# EAGLE board QFN32-4x4mm (EAGLE 8.1.0)
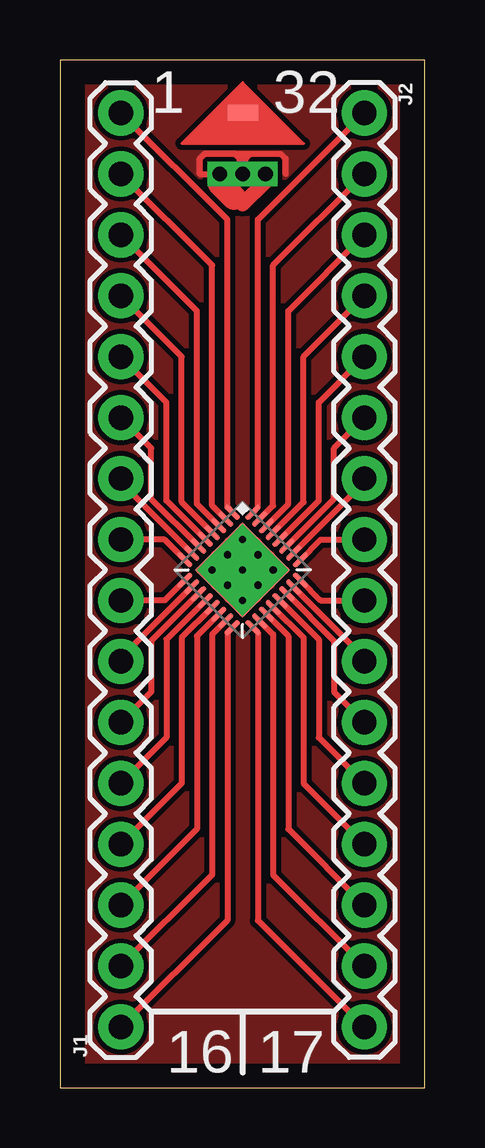
[diagram p0: board, top side]
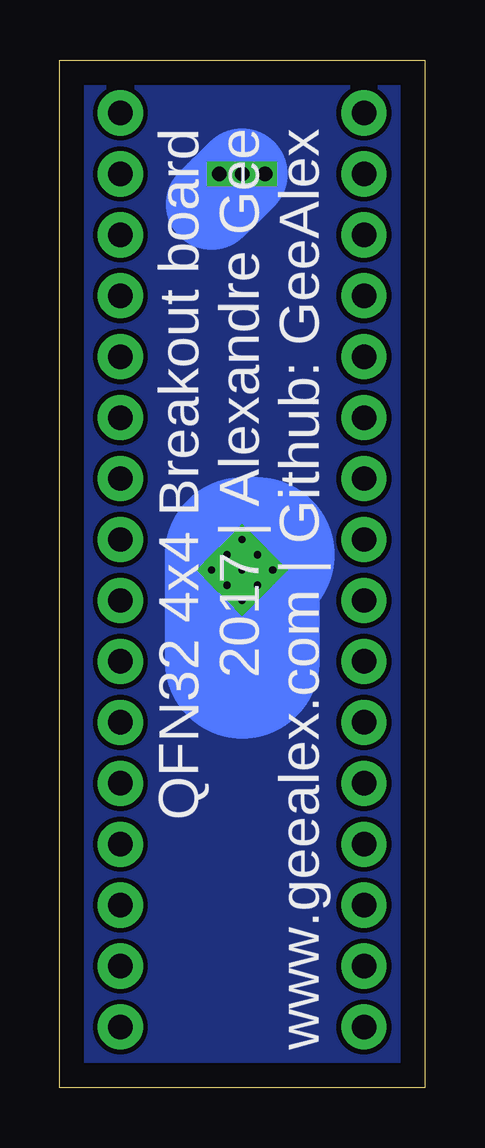
[diagram p1: board, bottom side, seen from below]

Size 15.22 x 42.85 mm. Coordinates in mm from the lower left corner, seen from the top.
Outline: 0,0 15.22,0 15.22,42.85 0,42.85 0,0
Copper layers (1*16): Top 0.035mm / dielectric 1.5mm / Bottom 0.035mm
Design rules "default": minimum track width 10mil, minimum drill 24mil, track to track 8mil, track to pad 8mil, pad to pad 8mil, via to via 8mil, smd to smd 8mil, copper to edge 40mil, drill to drill 8mil, minimum pad ring 10mil, minimum via ring 8mil, stop-mask expansion 4mil, vias tented up to drill 0mil, thermal gap 10mil

## Footprints (pad centres in the part's own frame; a part is rotated, then mirrored left to right if it is on the bottom)
1X16 = drill 1.016 pad 1.88: 1 0,0; 2 2.54,0; 3 5.08,0; 4 7.62,0; 5 10.16,0; 6 12.7,0; 7 15.24,0; 8 17.78,0; 9 20.32,0; 10 22.86,0; 11 25.4,0; 12 27.94,0; 13 30.48,0; 14 33.02,0; 15 35.56,0; 16 38.1,0
VQFN32 = smd 0.21 x 0.8: 1 -1.4,-2; 2 -1,-2; 3 -0.6,-2; 4 -0.2,-2; 5 0.2,-2; 6 0.6,-2; 7 1,-2; 8 1.4,-2; 17 1.4,2; 18 1,2; 19 0.6,2; 20 0.2,2; 21 -0.2,2; 22 -0.6,2; 23 -1,2; 24 -1.4,2 | smd 0.8 x 0.21: 9 2,-1.4; 10 2,-1; 11 2,-0.6; 12 2,-0.2; 13 2,0.2; 14 2,0.6; 15 2,1; 16 2,1.4; 25 -2,1.4; 26 -2,1; 27 -2,0.6; 28 -2,0.2; 29 -2,-0.2; 30 -2,-0.6; 31 -2,-1; 32 -2,-1.4 | smd 2.8 x 2.8: TP0 0,0 | drill 0.3 pad 0.9 square: TP1 0,0; TP2 -0.9,0; TP3 -0.9,-0.9; TP4 0,-0.9; TP5 0.9,-0.9; TP6 0.9,0.9; TP7 0,0.9; TP8 -0.9,0.9; TP9 0.9,0
PAD = smd 1.27 x 0.66: P$1 0,0

## Placement (x,y rotation side)
J1  [1X16]  2.54,2.54 90 top
J2  [1X16]  12.7,40.64 270 top
U$1  VQFN32  [VQFN32]  7.62,21.59 225 top
U$2  POINTUP  [PAD]  7.62,40.64 0 top

## Library data of the parts
J1 J2 = SparkFun-Connectors
U$1 = VQFN32
U$2 = pointup

## Nets
N$1: J2.1 U$1.32
N$2: J2.2 U$1.31
N$3: J2.3 U$1.30
N$4: J2.4 U$1.29
N$5: J2.5 U$1.28
N$6: J2.6 U$1.27
N$7: J2.7 U$1.26
N$8: J2.8 U$1.25
N$9: J2.9 U$1.24
N$10: J2.10 U$1.23
N$11: J2.11 U$1.22
N$12: J2.12 U$1.21
N$13: J2.13 U$1.20
N$14: J2.14 U$1.19
N$15: J2.15 U$1.18
N$16: J2.16 U$1.17
N$17: J1.16 U$1.1
N$18: J1.15 U$1.2
N$19: J1.14 U$1.3
N$20: J1.13 U$1.4
N$21: J1.12 U$1.5
N$22: J1.11 U$1.6
N$23: J1.10 U$1.7
N$24: J1.9 U$1.8
N$25: J1.8 U$1.9
N$26: J1.7 U$1.10
N$27: J1.6 U$1.11
N$28: J1.5 U$1.12
N$29: J1.4 U$1.13
N$30: J1.3 U$1.14
N$31: J1.2 U$1.15
N$32: J1.1 U$1.16
N$38: U$1.TP0 U$1.TP1 U$1.TP2 U$1.TP3 U$1.TP4 U$1.TP5 U$1.TP6 U$1.TP7 U$1.TP8 U$1.TP9 U$2.P$1

## Tracks (layer width: path | path; a pad name or v marks a point on that pad's centre or on a via)
GND
  pour Bottom: 0,42.86 15.24,42.86 15.24,0 0,0
  pour Top: 0,42.86 15.24,42.86 15.24,0 0,0
N$1
  Top 0.254: U$1.32 8.26,24.2 8.26,36.2 J2.1
N$2
  Top 0.254: U$1.31 8.89,24.27 8.89,34.29 J2.2
N$3
  Top 0.254: U$1.30 9.53,24.34 9.53,32.38 J2.3
N$4
  Top 0.254: U$1.29 10.16,24.41 10.16,30.48 J2.4
N$5
  Top 0.254: U$1.28 10.79,24.48 10.79,28.57 J2.5
N$6
  Top 0.254: U$1.27 11.43,24.55 11.43,26.67 J2.6
N$7
  Top 0.254: U$1.26 12.7,25.26 J2.7
N$8
  Top 0.254: U$1.25 10.87,22.86 J2.8
N$9
  Top 0.254: U$1.24 10.87,20.32 J2.9
N$10
  Top 0.254: U$1.23 12.7,17.92 J2.10
N$11
  Top 0.254: U$1.22 11.43,18.63 11.43,16.51 J2.11
N$12
  Top 0.254: U$1.21 10.79,18.7 10.79,14.61 J2.12
N$13
  Top 0.254: U$1.20 10.16,18.77 10.16,12.7 J2.13
N$14
  Top 0.254: U$1.19 9.53,18.84 9.53,10.79 J2.14
N$15
  Top 0.254: U$1.18 8.89,18.91 8.89,8.89 J2.15
N$16
  Top 0.254: U$1.17 8.26,18.98 8.26,6.99 J2.16
N$17
  Top 0.254: U$1.1 6.99,24.2 6.99,36.2 J1.16
N$18
  Top 0.254: U$1.2 6.35,24.27 6.35,34.29 J1.15
N$19
  Top 0.254: U$1.3 5.71,24.34 5.71,32.38 J1.14
N$20
  Top 0.254: U$1.4 5.08,24.41 5.08,30.48 J1.13
N$21
  Top 0.254: U$1.5 4.45,24.48 4.45,28.57 J1.12
N$22
  Top 0.254: U$1.6 3.81,24.55 3.81,26.67 J1.11
N$23
  Top 0.254: U$1.7 2.54,25.26 J1.10
N$24
  Top 0.254: U$1.8 4.37,22.86 J1.9
N$25
  Top 0.254: U$1.9 4.37,20.32 J1.8
N$26
  Top 0.254: U$1.10 2.54,17.92 J1.7
N$27
  Top 0.254: U$1.11 3.81,18.63 3.81,16.51 J1.6
N$28
  Top 0.254: U$1.12 4.45,18.7 4.45,14.61 J1.5
N$29
  Top 0.254: U$1.13 5.08,18.77 5.08,12.7 J1.4
N$30
  Top 0.254: U$1.14 5.71,18.84 5.71,10.79 J1.3
N$31
  Top 0.254: U$1.15 6.35,18.91 6.35,8.89 J1.2
N$32
  Top 0.254: U$1.16 6.99,18.98 6.99,6.99 J1.1
N$33  (via drill 0.61)
  Top 0.254: 6.73,38.48 6.67,38.42 v6.67,38.1 6.78,37.99 6.78,37.45 6.97,37.26 7.1,37.26 7.25,37.1
  Top 1.016: 7.25,37.1 6.67,37.69 v6.67,38.1
N$34  (via drill 0.61)
  Top 0.254: v8.57,38.1 8.46,38.1
  Top 0.61: v8.57,38.1 8.57,37.78 7.62,36.83
N$38  (via drill 0.61)
  Top 0.254: v7.62,38.1 7.51,38.21 7.51,38.74 7.31,38.94 | 7.31,38.94 6.02,38.94 | 5.83,38.74 5.83,38.1 | 6.02,38.94 5.83,38.74 | 9.41,38.74 9.41,38.1 9.41,38.74 | 5.83,38.1 5.83,38.74 | 5.83,38.74 6.02,38.94 | 6.02,38.94 7.31,38.94 | 7.31,38.94 9.22,38.94 | 9.22,38.94 9.41,38.74 | 9.22,38.94 7.93,38.94 7.73,38.74 7.73,38.21 v7.62,38.1 | 9.22,38.94 9.41,38.74 | 5.83,38.1 v7.62,38.1
  Bottom 0.254: v7.62,38.1 7.73,37.99 7.73,37.45 7.93,37.26 8.46,37.26 8.89,36.83
  Bottom 2.54: U$1.TP9 6.35,20.95 U$1.TP5
  Bottom 3.81: 8.89,36.83 v7.62,38.1
  Bottom 6.452: U$1.TP4 7.62,22.23 7.62,17.78
  pour Top: 0,42.86 15.24,42.86 15.24,0 0,0
  pour Bottom: 0,42.86 15.24,42.86 15.24,0 0,0

## Text on the board
tPlace: 1 | 32 | 16 | 17
bPlace: QFN32 4x4 Breakout board / 2017 | Alexandre Gee / www.geealex.com | Github: GeeAlex